# Altium PCB Antena.PcbDoc
Units mil, origin at the board's own origin, x right, y up, seen from the top; angles counter-clockwise.
Board outline 1350 x 2095 mil, 2 copper layers (Top Layer, Bottom Layer); 7 components, 8 nets, 23 pads, 7 vias.
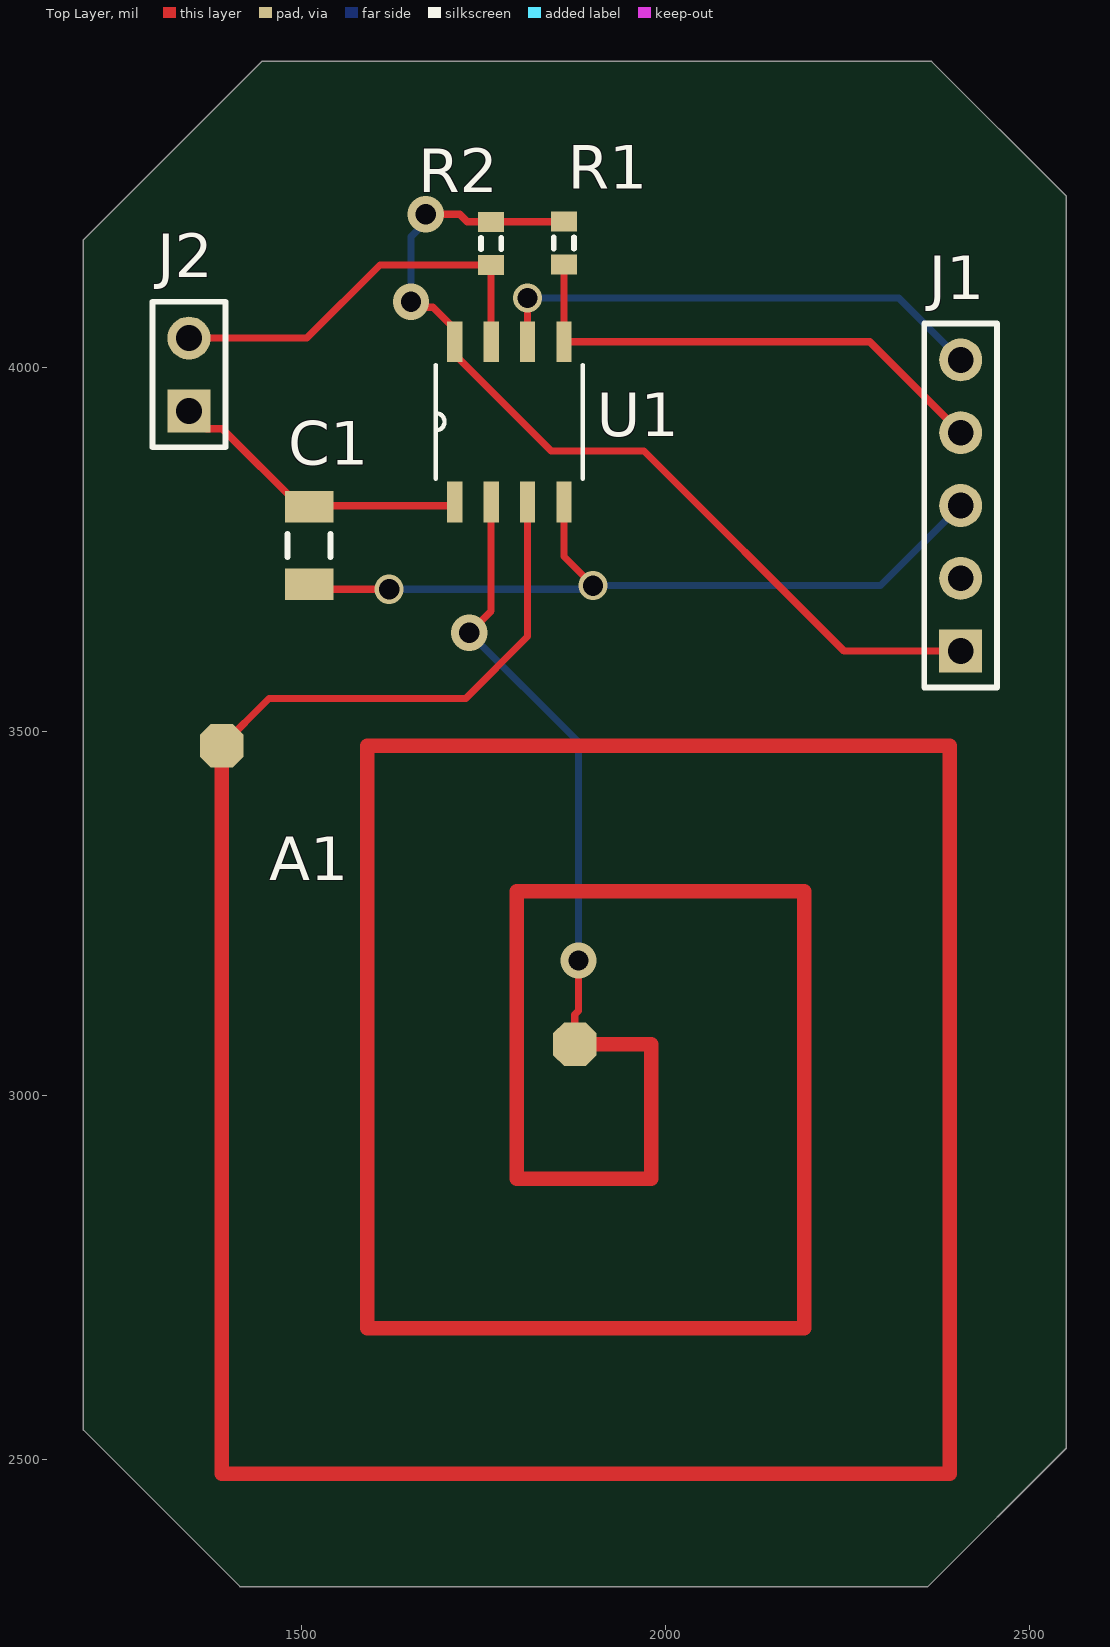
[diagram p0: Top Layer view]
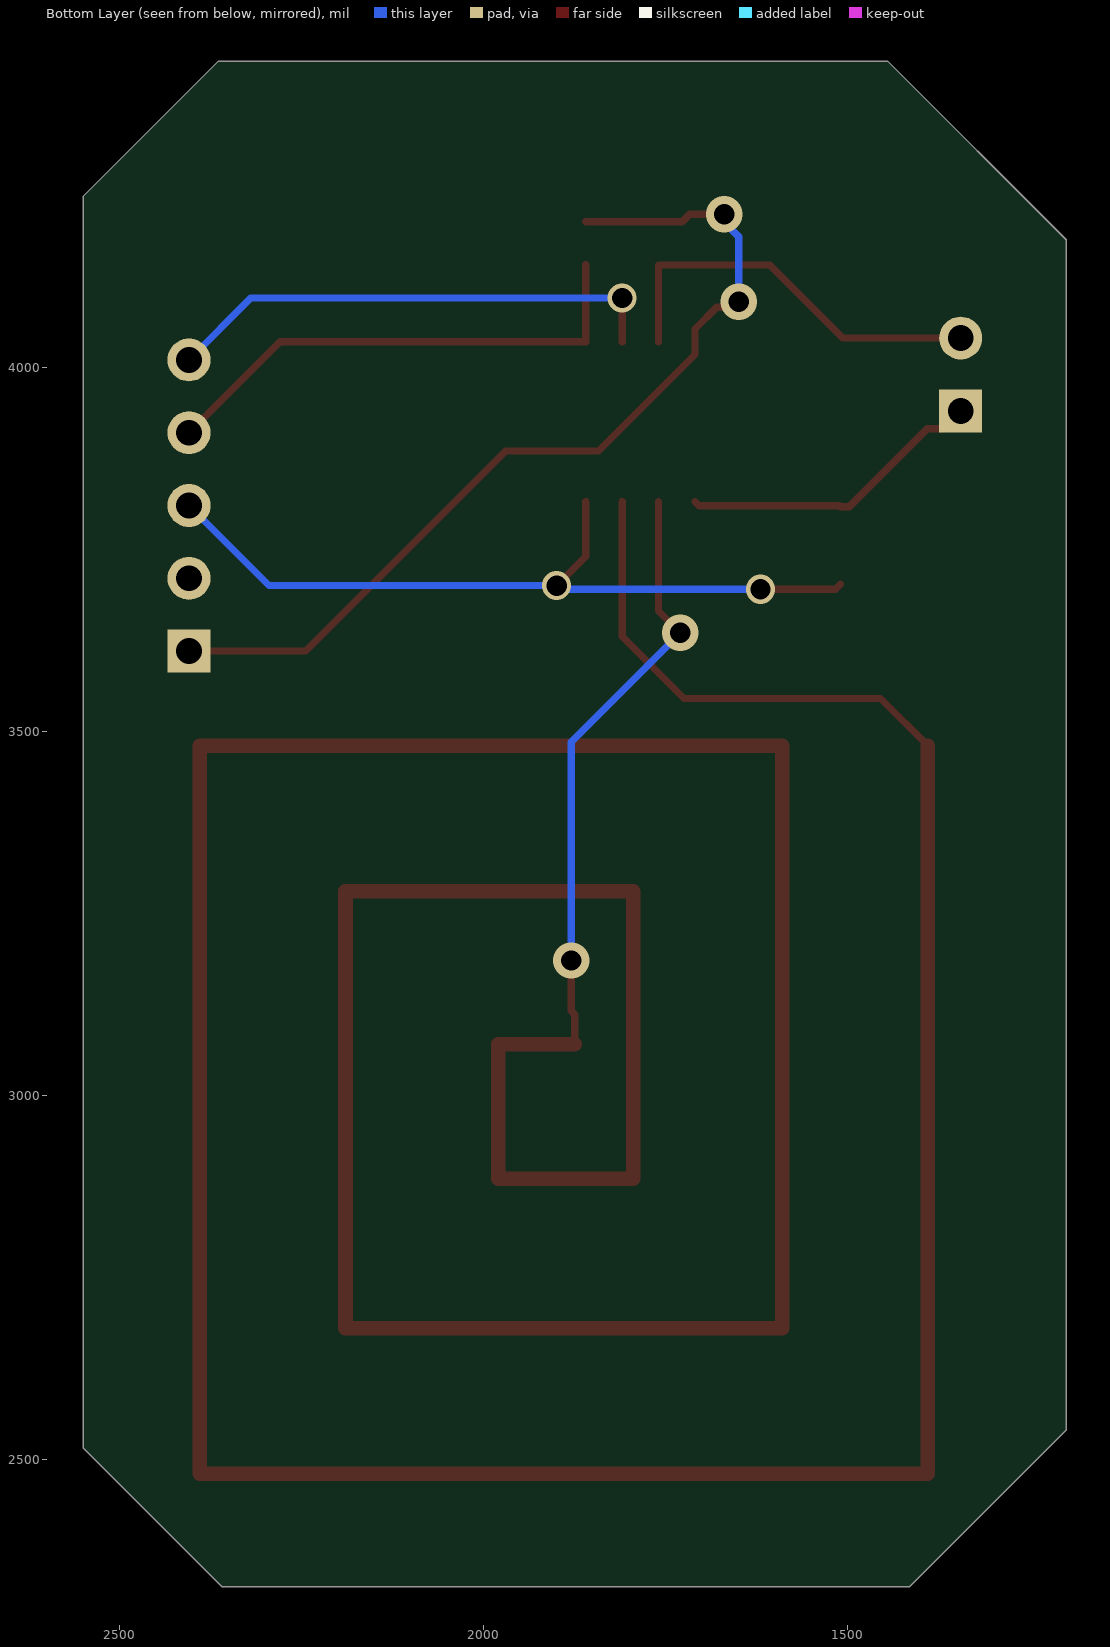
[diagram p1: Bottom Layer view, seen from below]

## Layer stack, top to bottom
Top Solder: solder mask 0.4, Solder Resist, Dk 3.5
Top Layer: signal copper 1.4
Dielectric 1: dielectric 12.6, FR-4, Dk 4.8
Bottom Layer: signal copper 1.4
Bottom Solder: solder mask 0.4, Solder Resist, Dk 3.5

## Board outline
1415,2325 1200,2540 1200,4175 1445,4420 2365,4420 2550,4235 2550,2515 2360,2325

## Design rules (kind name [scope] priority, off if disabled: settings)
Clearance [All] p1: gap=10 ignorepadtopadclearanceinfootprint=FALSE except(0: Arc-Hole Track-Hole SMDPad-Hole THPad-Hole Via-Hole Fill-Hole Poly-Hole Region-Hole Text-Hole)
PolygonConnect [All] p1: connectstyle=Relief reliefconductorwidth=10 reliefentries=4 polygonreliefangle="90 Angle" airgapwidth=10
RoomDefinition Antena [InComponentClass('Antena')] p1: confinementstyle=ConfineIn formatcopy=TRUE lockcomponents=FALSE outline 0,0 2000,0 2000,1000 0,1000
RoutingVias [All] p1: holewidth=28 width=50 viastyle="Through Hole" minholewidth=28 minwidth=50 maxholewidth=28 maxwidth=50
SolderMaskExpansion [All] p1: expansion=4 istentingtop=FALSE
Width [All] p1: maxlimit=10 minlimit=10 preferedwidth=10
30 further rules are at their usual default settings.

## Components (designator, comment, footprint, x,y, rotation, side; value= is the part's Value field where it differs from the comment)
A1 "Antenna" Antenna1 1380,1880 r0 top
C1 "Cap Semi" C1206 1510,3755 r90 top value=10nF
J1 "TSM-105-02-S-SV" HDR1X5 2405,3610 r90 top
J2 "TSM-102-02-S-SV" HDR1X2 1345,3940 r90 top
R1 "OPEN" J1-0603 1860,4170.47 r90 top value=20K
R2 "" J1-0603 1760,4170 r90 top value=20K
U1 "M24LR64-RMN6/2" SOIC127P600X175-8N 1785,3925 r90 top

## Footprints (in the part's own frame and the unit in brackets; to place one, negate y for a bottom-side part, rotate by r counter-clockwise, add the part's x,y. Pads: shape width x height; smd on the part's side, far side on the other; paste and mask are expansions set on the pad)
Antenna1 [mil]
  oct 60x60 smd: 0(10,1600) 1(495,1190)
  Top Layer lines w20: 10,1600 10,600 1010,600 1010,1600 210,1600 210,800 810,800 810,1400 415,1400 415,1005 600,1005 600,1190 495,1190
C1206 [mm] "Chip Capacitor, Body 3.2x1.6mm, IPC High Density"
  rect 1.1x1.7 smd: 1(-1.35,0) 2(1.35,0)
  silkscreen extent -0.4,-0.75 0.4,0.75, body extent -1.7,-0.9 1.7,0.9, height 1.3
HDR1X2 [mm] "Connector; Header; 2 Position"
  rect 1.5x1.5 hole 0.9: 1(0,0)
  round 1.5 hole 0.9: 2(2.54,0)
  silkscreen extent -1.27,-1.27 3.81,1.27
HDR1X5 [mm] "Connector; Header; 5 Position"
  rect 1.5x1.5 hole 0.9: 1(0,0)
  round 1.5 hole 0.9: 2(2.54,0) 3(5.08,0) 4(7.62,0) 5(10.16,0)
  silkscreen extent -1.27,-1.27 11.43,1.27
J1-0603 [mm] "Chip Resistor, Body 1.6x0.8mm, IPC High Density"
  rect 0.7x0.9 smd: 1(-0.75,0) 2(0.75,0)
  silkscreen extent -0.2,-0.35 0.2,0.35, body extent -0.85,-0.48 0.85,0.48, height 0.9
SOIC127P600X175-8N [mil]
  rect 56x21 smd: 1(-110,75) 2(-110,25) 3(-110,-25) 4(-110,-75) 5(110,-75) 6(110,-25) 7(110,25) 8(110,75)
  silkscreen extent -78,-101 78,101

## Part data
C1: "Capacitor (Semiconductor SIM Model)", LatestRevisionDate=29-May-2009, LatestRevisionNote="IPC-7351 Footprint Added.", PackageDescription="Chip Capacitor", PackageReference=C1206, Published=8-Jun-2000, Publisher="Altium Limited"
J1: library part "Header 5", LatestRevisionDate=17-Jul-2002, LatestRevisionNote="Re-released for DXP Platform.", Publisher="Altium Limited"
J2: library part "Header 2", "Header, 2-Pin", LatestRevisionDate=17-Jul-2002, LatestRevisionNote="Re-released for DXP Platform.", Publisher="Altium Limited"
R1 R2: library part Res3, "Resistor", LatestRevisionDate=29-May-2009, LatestRevisionNote="IPC-7351 Footprint Added.", PackageDescription="Chip Resistor", PackageReference=J1-0603, Published=8-Jun-2000, Publisher="Altium Limited"
U1: "64 Kbit EEPROM", Case/Package=SOIC, Frequency=400kHz, Manufacturer 1=STMicroelectronics, Manufacturer Part Number 1=M24LR16E-RMN6T/2, Max Frequency=13.56MHz, Max Operating Temperature=85°C, Max Supply Voltage=5.5V, Min Operating Temperature=-40°C, Min Supply Voltage=1.8V, Nominal Supply Current=500uA, Package=None, Package Quantity=1, Access Time=900ns, Access Time-Max=900ns, Availability=Unavailable, ComponentLink1Description=https://datasheet.ciiva.com/2803/en-dm00031737-2803398.pdf?src-supplier=Digi-Key, ComponentLink1URL=https://datasheet.ciiva.com/2803/en-dm00031737-2803398.pdf?src-supplier=Digi-Key, Density=16Kb, Depth=4mm, Height=1.25mm, Interface=I2C,2-Wire,Serial, Lead Free="Lead Free", Length=5mm, Memory Size=16Kb, Mount="Surface Mount", MP=M24LR64-RMN6-2, Number of Pins=8, Number of Words=2048, Organization=2KX8, Packaging="Tape and Reel", Price=None, Pricing 1="1=1,69000, 10=1,50000, 25=1,35520, 100=1,18580, 250=1,04060, 500=0,91960, 1000=0,84700 (USD)", Programming Voltage=5.5V, Radiation Hardening=No, Reach SVHC Compliant=Yes, RoHS=Yes, RoHS Compliant=Yes, Series=-, Stock 1=7462, Supplier 1=Digi-Key, Supply Current=500uA, Width=4mm, Write Protection=YES

## Via types
v1: diameter 50, hole 28, Top Layer to Bottom Layer, 4 vias
v2: diameter 40, hole 28, Top Layer to Bottom Layer, 3 vias

## Nets (pads, with @x,y where several pads share a name; then routed paths per layer and width w, separated by ;. In a path a pad name is that pad's centre, name@x,y a point inside that pad or via, vN(x,y) a via of type N, cw(c..) or ccw(c..) an arc to the next point about the centre after c; other vN are vias at no path point)
GND: C1.1 J1.3 U1.4 | length 1077
  Top Layer w10: C1.1 1516.85,3695 v2(1620,3695) ; U1.4 1860,3740 v2(1900,3700)
  Bottom Layer w10: v2(1620,3695) 1895,3695 v2(1900,3700) 2295,3700 J1.3
NetA1_0: A1.0 U1.3 | length 667.1
  Top Layer w10: A1.0 1455,3545 1725,3545 1810,3630 U1.3
NetA1_1: A1.1 U1.2 | length 821.6
  Top Layer w10: v1(1730,3635) 1760,3665 U1.2 ; A1.1 1875,3110.86 1880,3115.86 v1(1880,3185)
  Bottom Layer w10: v1(1730,3635) 1880,3485 v1(1880,3185)
NetC1_2: C1.2 J2.1 U1.1 | length 422.5
  Top Layer w10: J2.1 1369.53,3915.47 1390.87,3915.47 1498.19,3808.15 C1.2 1511.35,3809.5 1704.5,3809.5 U1.1
NetJ1_4: J1.4 R1.1 U1.5 | length 702.7
  Top Layer w10: R1.1 U1.5 2280,4035 J1.4
NetJ1_5: J1.5 U1.6 | length 690.2
  Top Layer w10: U1.6 v2(1810,4095)
  Bottom Layer w10: v2(1810,4095) 2320,4095 J1.5
NetJ2_2: J2.2 R2.1 U1.7 | length 562.1
  Top Layer w10: J2.2 1506.93,4040 1607.4,4140.47 R2.1 U1.7
VCC: J1.1 R1.2 R2.2 U1.8 | length 1297.1
  Top Layer w10: v1(1650,4090) 1657.65,4082.35 1680.15,4082.35 1710,4052.5 U1.8 1710,4017.5 1842.5,3885 1970,3885 2245,3610 J1.1 ; v1(1670,4210) 1717.03,4210 1727.28,4199.75 1759.78,4199.75 R2.2 1760.24,4199.76 1859.76,4199.76 R1.2
  Bottom Layer w10: v1(1650,4090) 1650,4179.18 1670,4199.18 v1(1670,4210)
pads on no net: J1.2

## Silkscreen, mask and mechanical layers (free items; w line width, h text height)
Mechanical 15:
  the board outline again, w10